# Altium PCB Copy of PCB NHÓM 18-L01.pcbdoc
Units mil, origin at the board's own origin, x right, y up, seen from the top; angles counter-clockwise.
Board outline 2722.2 x 1700 mil, 2 copper layers (Top Layer, Bottom Layer); 35 components, 51 nets, 178 pads, 25 vias.
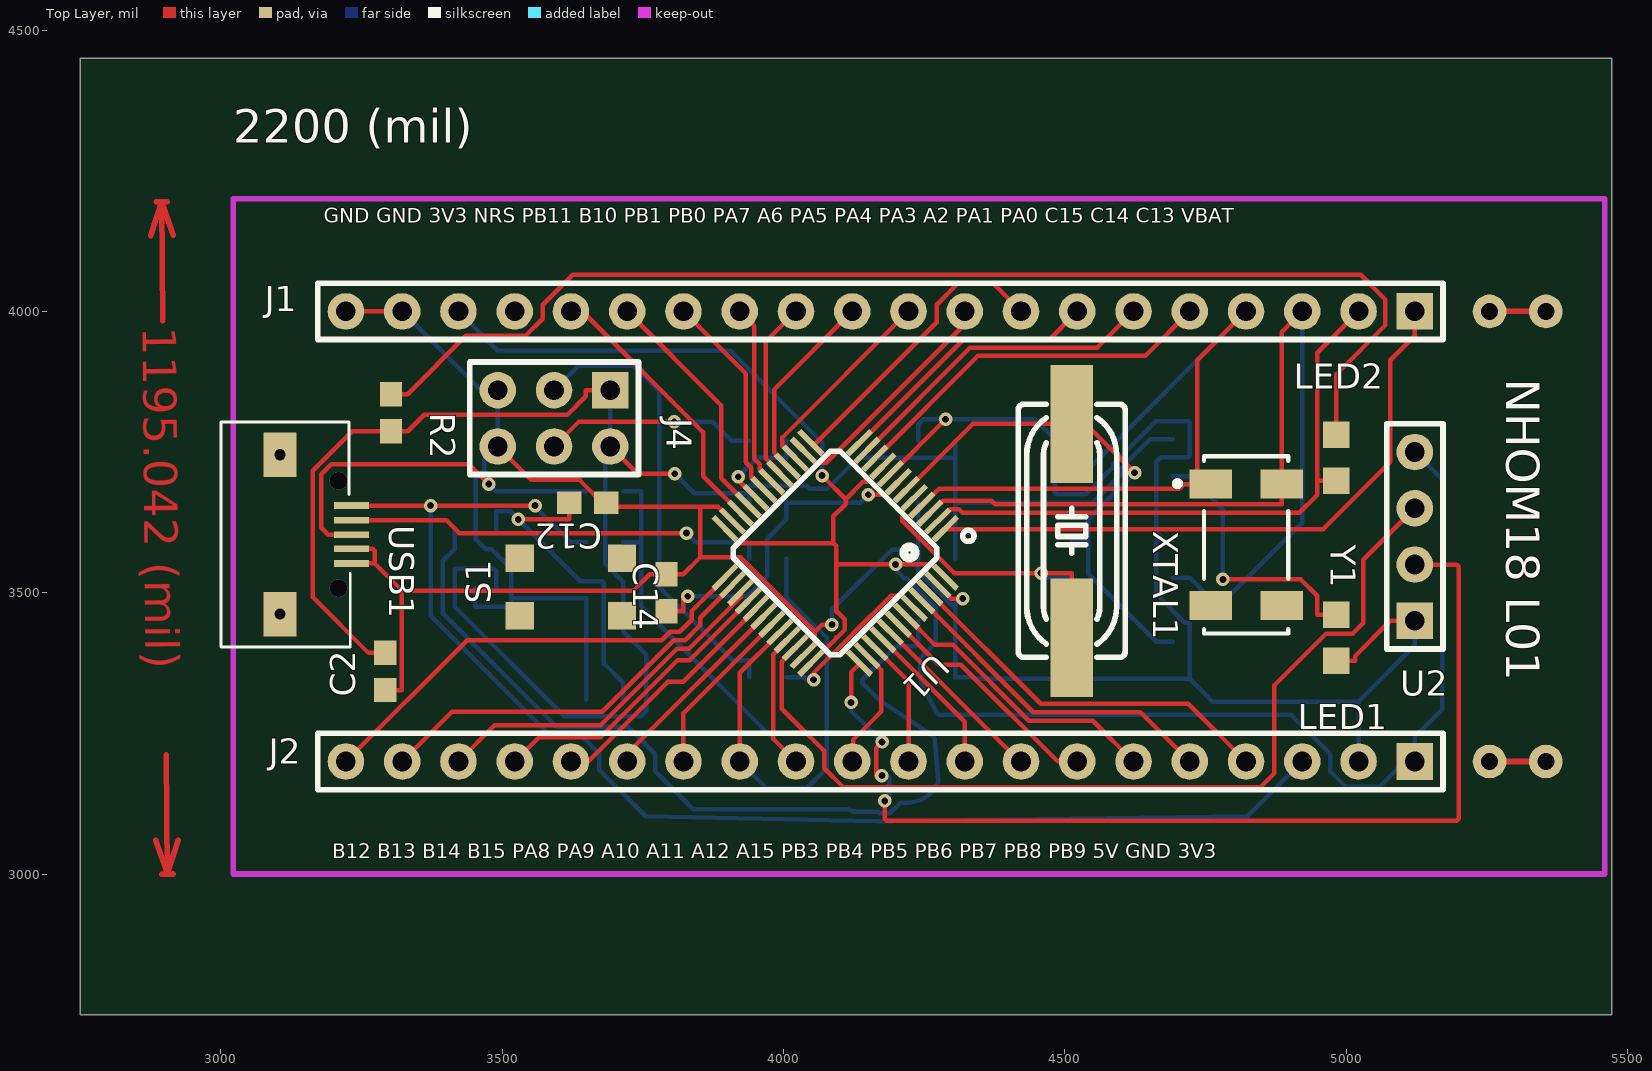
[diagram p0: Top Layer view]
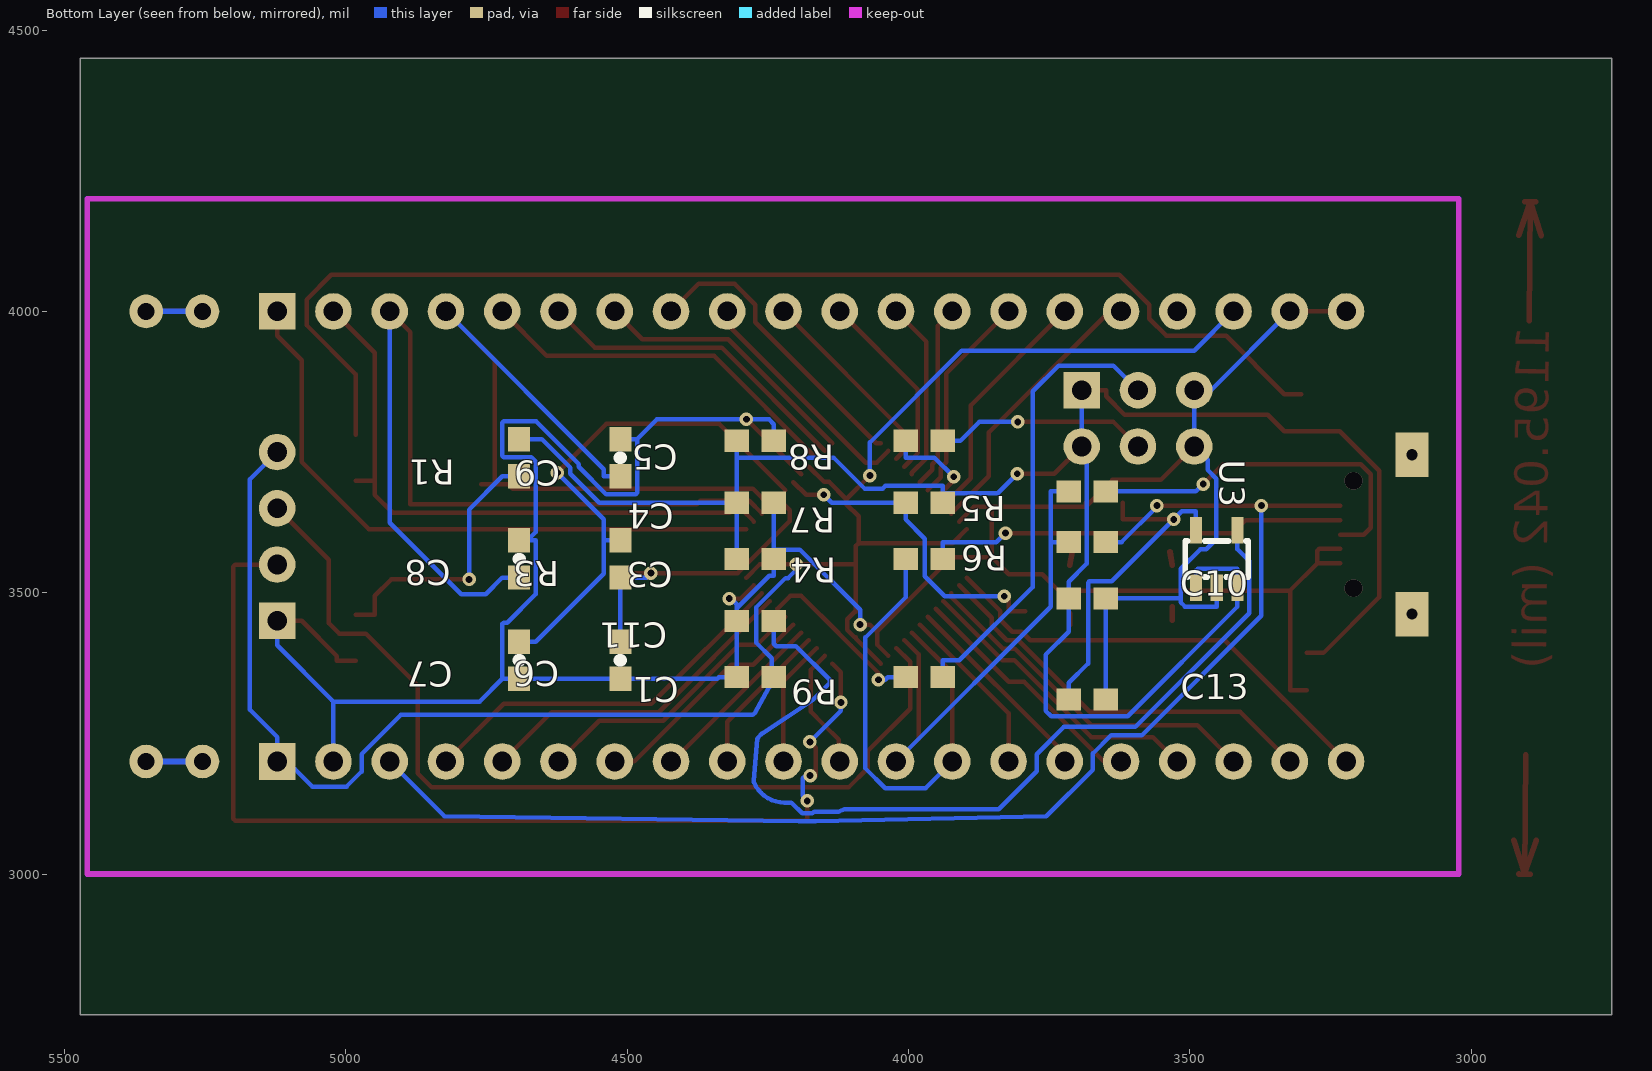
[diagram p1: Bottom Layer view, seen from below]

## Layer stack, top to bottom
Top Solder Mask Layer: solder mask 0.4, Solder Resist, Dk 3.5
Top Layer: signal copper 1.4
Dielectric1: dielectric 12.6, FR-4, Dk 4.8
Bottom Layer: signal copper 1.4
Bottom Solder Mask Layer: solder mask 0.4, Solder Resist, Dk 3.5

## Board outline
5472.2,2750 2750,2750 2750,4450 5472.2,4450

## Design rules (kind name [scope] priority, off if disabled: settings)
Clearance Default [All] p1: gap=6 ignorepadtopadclearanceinfootprint=FALSE except(0: Region-Region; 7: Arc-Arc Arc-Track Arc-SMDPad Arc-THPad Arc-Via Arc-Fill Arc-Poly Arc-Region Arc-Text Arc-Hole)
PasteMaskExpansion Common_1 [All] p1: expansion=0
PlaneConnect Default_3 [All] p1: planeconnectstyle=Relief reliefexpansion=20 reliefentries=4 reliefconductorwidth=0 reliefairgap=1
PolygonConnect Default_4 [All] p1: connectstyle=Relief reliefconductorwidth=10 reliefentries=4 polygonreliefangle="90 Angle" airgapwidth=10
RoutingVias Default_2 [All] p1: holewidth=12 width=24 viastyle="Through Hole" minholewidth=12 minwidth=24 maxholewidth=2362 maxwidth=3938
SolderMaskExpansion Common [All] p1: expansion=2 istentingtop=FALSE useseparateexpansions=TRUE expansionbottom=2 istentingbottom=FALSE
Width Default_1 [All] p1: maxlimit=1000 minlimit=6 preferedwidth=6
28 further rules are at their usual default settings.

## Components (designator, comment, footprint, x,y, rotation, side; value= is the part's Value field where it differs from the comment)
C1 "100nF" 0603 4272.2,3350 r180 bottom
C2 "100nF" 0603 3292.2,3360 r90 top
C3 "100nF" 0603 4272.2,3560 r0 bottom
C4 "100nF" 0603 4272.2,3660 r0 bottom
C5 "100nF" 0603 4272.2,3770 r0 bottom
C6 "CAP" 0603-CAP 4512.2,3380 r90 bottom
C7 "CAP" 0603-CAP 4692.2,3380 r90 bottom
C8 "CAP" 0603-CAP 4692.2,3560 r270 bottom
C9 "CAP" 0603-CAP 4512.2,3740 r270 bottom
C10 "105" 0603 3682.2,3490 r180 bottom
C11 "223" 0603 4272.2,3450 r180 bottom
C12 "106" 0603 3652.2,3660 r180 top
C13 "104" 0603 3682.2,3310 r0 bottom
C14 "105" 0603 3792.2,3500 r270 top
J1 "HEADER-20P-2.54" H20-2.54 4172.2,4000 r270 top
J2 "HEADER-20P-2.54" H20-2.54 4172.2,3200 r270 top
J4 "F185-1203A1BSYA1" H2X3-2.54 3592.2,3810 r270 top
LED1 "LEDCHIPLED_0805" CHIPLED_0805 4982.2,3420 r180 top
LED2 "LEDCHIPLED_0805" CHIPLED_0805 4982.2,3740 r180 top
R1 "510Ω" 0603 4692.2,3740 r90 bottom
R2 "510Ω" 0603 3302.2,3820 r270 top
R3 "1M" 0603 4512.2,3560 r270 bottom
R4 "20R" 0603 3972.2,3560 r0 bottom
R5 "20R" 0603 3682.2,3680 r0 bottom
R6 "4.7K" 0603 3682.2,3590 r0 bottom
R7 "10K" 0603 3972.2,3660 r180 bottom
R8 "100K" 0603 3972.2,3770 r180 bottom
R9 "100K" 0603 3972.2,3350 r0 bottom
S1 "2P-SW-SMD" 2PSW-SMD 3622.2,3510 r0 top
U1 "IC_UC_STM32" LQFP48 4091.7,3570.73 r225 top
U2 "header4" H4-2.54 5122.2,3600 r180 top
U3 "RT9193-33GB" SOT-23-5 3452.2,3560 r180 bottom
USB1 "USB-Micro-1" MicroUSB 3202.2,3700 r270 top
XTAL1 "8M" HC-49U 4512.2,3610 r270 top
Y1 "RSM200S32.768" RSM200S 4822.2,3590 r270 top

## Footprints (in the part's own frame and the unit in brackets; to place one, negate y for a bottom-side part, rotate by r counter-clockwise, add the part's x,y. Pads: shape width x height; smd on the part's side, far side on the other; paste and mask are expansions set on the pad)
2PSW-SMD [mil]
  rect 50x25 smd: 1(-91,63) 2(91,63) 3(91,-63) 4(-91,-63) P$1(-91,39) P$2(91,39) P$3(91,-39) P$4(-91,-39)
  Top Layer lines w10: -91,-59 -91,-35 ; -91,39 -87,63 ; 87,63 91,39 ; 91,-67 91,-47
0603 [mil]
  rect 43.3x39.4 smd: 1(-33,0) 2(33,0)
0603-CAP [mil]
  rect 43.3x39.4 smd: 1(-33,0) 2(33,0)
  silkscreen extent 0,-1 0,1
CHIPLED_0805 [mil]
  rect 47.2x47.2 smd: A(0,-41) C(0,41)
H2X3-2.54 [mil]
  rect 65x65 hole 35: 1(-50,100)
  round 65 hole 35: 2(-50,0) 3(-50,-100) 4(50,-100) 5(50,0) 6(50,100)
  silkscreen extent -100,-150 100,150
H4-2.54 [mil]
  rect 65x65 hole 35: 1(0,150)
  round 65 hole 35: 2(0,50) 3(0,-50) 4(0,-150)
  silkscreen extent -50,-200 50,200
H20-2.54 [mil]
  rect 65x65 hole 35: 1(0,950)
  round 65 hole 35: 2(0,850) 3(0,750) 4(0,650) 5(0,550) 6(0,450) 7(0,350) 8(0,250) 9(0,150) 10(0,50) 11(0,-50) 12(0,-150) 13(0,-250) 14(0,-350) 15(0,-450) 16(0,-550) 17(0,-650) 18(0,-750) 19(0,-850) 20(0,-950)
  silkscreen extent -50,-1000 50,1000
HC-49U [mil]
  rect 210x76 smd: 1(-190,0) 2(190,0)
  silkscreen extent -225,-95 225,95
LQFP48 [mil]
  rect 59.1x10 smd: 1(-169,108.02) 2(-169.01,89.02) 3(-169.01,69.02) 4(-169,49.02) 5(-169.01,30.02) 6(-169.01,10.02) 7(-169.01,-9.98) 8(-169,-29.98) 9(-169.01,-48.98) 10(-169.01,-68.98) 11(-169,-88.98) 12(-169.01,-107.98) 25(169,-107.98) 26(169,-88.98) 27(169,-68.99) 28(169,-48.97) 29(169,-29.98) 30(169,-9.98) 31(168.99,10.02) 32(169,30.02) 33(169,49.02) 34(168.99,69.02) 35(169,89.02) 36(169,108.02)
  rect 10x59.1 smd: 13(-108,-168.98) 14(-89,-168.98) 15(-69.01,-168.98) 16(-49,-168.98) 17(-30,-168.98) 18(-10.01,-168.98) 19(10,-168.98) 20(30,-168.98) 21(49,-168.98) 22(69,-168.98) 23(89,-168.98) 24(108,-168.98) 37(108,169.02) 38(89,169.02) 39(68.99,169.02) 40(49,169.02) 41(30,169.02) 42(9.99,169.02) 43(-10.01,169.02) 44(-30,169.02) 45(-49,169.02) 46(-69.01,169.02) 47(-89,169.02) 48(-108,169.02)
  silkscreen extent -199,-134 134,156
MicroUSB [mil]
  rect 12x63 smd: 1(45,30) 2(71,30) 3(97,30) 4(122,30) 5(148,30)
  rect 79x59 hole 20: 6(-45,-97) 6(238,-97)
  silkscreen extent -103,-202 296,28
RSM200S [mil]
  rect 51.5x75.5 smd: 1(-103,-63) 2(113,-63) 3(113,63) 4(-103,63)
  silkscreen extent -152,-127 162,75
SOT-23-5 [mil]
  rect 21.7x47.2 smd: 1(-37,-51) 2(0,-51) 3(37,-51) 4(37,51) 5(-37,51)
  silkscreen extent -56,-32 56,32

## Free pads (board coordinates)
  round 60 hole 30: 2(5255,4000) 3(5355,4000) 4(5255,3200) 5(5355,3200)

## Via types
v1: diameter 24, hole 12, Top Layer to Bottom Layer, 23 vias
v2: diameter 31.5, hole 31.5, Top Layer to Bottom Layer, 2 vias

## Nets (pads, with @x,y where several pads share a name; then routed paths per layer and width w, separated by ;. In a path a pad name is that pad's centre, name@x,y a point inside that pad or via, vN(x,y) a via of type N, cw(c..) or ccw(c..) an arc to the next point about the centre after c; other vN are vias at no path point)
5V: J2.3 R6.1 USB1.1 | length 2395.8
  Top Layer w8: USB1.1 v1(3372.8,3655) v1(3558.4,3655)
  Bottom Layer w8: v1(3372.8,3655) 3372.8,3458.83 3585.09,3246.54 3639.98,3246.54 3672.2,3214.32 3672.2,3185.39 3755,3102.59 4165.09,3094 4194.91,3094 4824.8,3102.6 J2.3 ; v1(3558.4,3655) 3558.43,3652.92 3621.35,3590 3635.3,3590 3642.81,3590 3646.03,3590 R6.1
BOOT0: R9.2 U1.44 | length 307.4
  Top Layer w8: v1(4053.4,3345.5) 4053.4,3357.19 4101.59,3405.38 4101.75,3405.38 4124.01,3427.64 4124.01,3427.8 4190.48,3494.27 4210.38,3494.27 U1.44@4232.95,3471.7
  Bottom Layer w8: R9.2 4036.91,3350 4041.37,3345.54 v1(4053.4,3345.5)
BOOT1: R8.1 U1.20 | length 180.3
  Top Layer w8: v1(3919.8,3706.1) 3919.83,3699.92 U1.20@3951.5,3668.25
  Bottom Layer w8: v1(3919.8,3706.1) 3954.01,3740.29 4005.25,3740.29 R8.1
C13_2: C12.2 C13.2 U3.5 | length 620.2
  Top Layer w8: v1(3528.7,3630.3) 3619.25,3630.29 C12.2
  Bottom Layer w8: U3.5 3489.25,3644.61 3514.35,3644.61 v1(3528.7,3630.3) 3638.79,3520.17 3678.61,3520.17 3680.92,3517.86 3680.92,3374.04 3715.25,3339.71 C13.2
GND: C1.1 C2.1 C3.1 C4.1 C5.1 C6.1 C7.1 C8.1 C9.1 C10.2 C11.1 C12.1 C13.1 C14.1 J1.19 J1.20 J2.2 J4.3 J4.4 LED1.C S1.2 U1.8 U1.23 U1.35 U1.47 U2.1 U3.2 USB1.4 USB1.5 | length 6289.1
  Top Layer w8: J1.20 J1.19 ; USB1.5 3273.71,3552 ; USB1.4 3269.96,3578 3273.71,3574.25 3273.71,3552 ; C2.1 3321.91,3326.95 3321.91,3503.8 ; J4.4 3551.86,3700.34 3637.48,3700.34 C12.1@3685.25,3652.57 ; C12.1 C12.1@3685.25,3652.57 ; U1.23@3909.75,3626.55 3883.73,3652.57 3851.62,3652.57 ; U1.35@4035.65,3387.55 4055.91,3407.81 4055.91,3430.59 ; v1(4086,3443.4) 4068.72,3443.4 4055.91,3430.59 ; U1.8@4190.5,3710.7 4190.5,3710.81 v1(4288,3808.3) ; U1.47@4274.65,3513.42 4298.37,3489.7 v1(4318.7,3489.7) ; LED1.C 5015.81,3379 5015.81,3387.12 5078.69,3450 U2.1 ; 3273.71,3552 3321.91,3503.8 ; 3321.91,3503.8 3733.34,3503.8 3762.49,3532.95 3777.35,3532.95 C14.1 3821.91,3532.95 3851.62,3562.66 ; C12.1@3685.25,3652.57 3851.62,3652.57 ; 3851.62,3562.66 3923.84,3562.66 4055.91,3430.59 ; 3851.62,3562.66 3851.62,3652.57
  Bottom Layer w8: J1.19 3462.2,3860 J4.3 J4.4 3468.38,3736.18 3468.38,3718.17 ; U3.2 3452.25,3475.39 3508.7,3475.39 3516,3482.69 3516,3490 ; 3468.37,3718.17 3452.98,3702.78 3452.98,3595.11 3470.71,3577.38 3481.12,3577.38 3516,3542.5 3516,3490 ; C13.1 3649.25,3339.71 3649.25,3460.29 C10.2 3617.59,3490 3516,3490 ; v1(4086,3443.4) 4085.99,3469.58 4193.01,3576.6 C3.1@4239.25,3576.6 ; C4.1 C3.1@4239.25,3576.6 ; C5.1 4239.25,3799.71 4247.85,3808.31 v1(4288,3808.3) 4447.13,3808.31 4482.49,3772.95 ; v1(4318.7,3489.7) 4315.24,3489.7 4305.25,3479.71 4305.25,3472.28 ; C9.1 4482.49,3772.95 ; C8.1 C8.1@4677.35,3592.95 ; J2.2 5022.2,3306.49 ; U2.1 5122.2,3406.49 5024.75,3309.04 5022.2,3306.49 ; C3.1@4239.25,3576.6 C3.1 4239.25,3530.29 4247.24,3530.29 4305.25,3472.28 ; 4305.25,3472.28 4305.25,3464.85 C11.1 C1.1 4336.91,3350 4339.96,3346.95 C6.1 C7.1 4707.06,3346.95 4721.91,3346.95 ; 4482.49,3772.95 4482.49,3677.6 4484.81,3675.28 4537.53,3675.28 4586.11,3723.86 4586.11,3728.71 4662.02,3804.62 4719.59,3804.62 4721.92,3802.29 4721.92,3743.28 4719.59,3740.95 4670.7,3740.95 4662.48,3732.73 4662.48,3607.82 C8.1@4677.35,3592.95 ; C8.1@4677.35,3592.95 4662.49,3592.95 4662.49,3497.6 4713.23,3446.86 4719.58,3446.86 4721.91,3444.53 4721.91,3346.95 ; 4721.91,3346.95 4762.37,3306.49 5022.2,3306.49
J4_2: J4.2 R9.1 | length 815.4
  Bottom Layer w8: J4.2 3635.72,3903.52 3733.39,3903.52 3779.12,3857.79 3779.12,3510.13 3909.54,3379.71 3939.25,3379.71 R9.1
J4_5: J4.5 R8.2 | length 379
  Top Layer w8: J4.5 3635.72,3803.52 v1(3805.8,3803.5)
  Bottom Layer w8: v1(3805.8,3803.5) 3874.07,3803.52 3907.59,3770 R8.2
LED1_A: LED1.A R1.1 | length 484.4
  Top Layer w8: v1(4781,3523.6) 4919.58,3523.62 4948.59,3494.61 4948.59,3461 LED1.A
  Bottom Layer w8: R1.1 4721.91,3706.95 4780.98,3647.88 v1(4781,3523.6)
OSCIN: C6.2 R3.2 U1.5 XTAL1.2 | length 681.9
  Top Layer w8: U1.5@4232.95,3668.25 4211.3,3646.6 4211.3,3627.36 4303.65,3535.01 v1(4457.8,3535) 4512.2,3535.01 XTAL1.2
  Bottom Layer w8: v1(4457.8,3535) 4465.84,3526.95 4482.49,3526.95 R3.2@4497.35,3526.95 ; C6.2 4512.2,3512.1 R3.2@4497.35,3526.95 ; R3.2 R3.2@4497.35,3526.95
OSCOUT: C7.2 R3.1 U1.6 XTAL1.1 | length 933.5
  Top Layer w8: U1.6@4218.8,3682.42 4336.38,3800 XTAL1.1 4537.09,3800 v1(4624.1,3713)
  Bottom Layer w8: R3.1 4541.91,3592.95 ; v1(4624.1,3713) 4541.91,3630.74 4541.91,3592.95 ; C7.2 4662.49,3412.95 4541.91,3533.53 4541.91,3592.95
PA0: J1.5 U1.10 | length 667.7
  Top Layer w8: U1.10@4162.95,3738.25 4345.44,3920.74 4642.94,3920.74 J1.5
PA1: J1.6 U1.11 | length 576
  Top Layer w8: U1.11@4148.78,3752.42 4332.11,3935.75 4557.95,3935.75 J1.6
PA2: J1.7 U1.12 | length 483.8
  Top Layer w8: U1.12@4135.35,3765.85 4320.26,3950.76 4472.96,3950.76 J1.7
PA3: J1.8 U1.13 | length 528.9
  Top Layer w8: U1.13@4049.08,3765.85 4057.21,3765.85 4272.2,3980.84 4272.2,4011.99 4309.16,4048.95 4373.25,4048.95 J1.8
PA4: J1.9 U1.14 | length 420.1
  Top Layer w8: U1.14@4035.65,3752.42 4056.88,3731.19 4076.2,3731.19 4322.2,3977.19 J1.9
PA5: J1.10 U1.15 | length 364.2
  Top Layer w8: U1.15@4021.53,3738.25 3998.17,3761.61 3998.17,3775.97 J1.10
PA6: J1.11 U1.16 | length 343.5
  Top Layer w8: U1.16@4007.35,3724.15 3983.15,3748.35 3983.15,3860.95 J1.11
PA7: J1.12 U1.17 | length 322.4
  Top Layer w8: U1.17@3993.95,3710.7 3993.95,3713.19 3968.13,3739.01 3968.13,3945.93 J1.12
PA8: J2.16 U1.29 | length 441.8
  Top Layer w8: J2.16 3652.9,3200 3794.69,3341.79 3821.59,3341.79 U1.29@3951.5,3471.7
PA9: J2.15 U1.30 | length 358.4
  Top Layer w8: J2.15 3722.2,3214.1 U1.30@3965.65,3457.55
PA10: J2.14 U1.31 | length 308.7
  Top Layer w8: J2.14 3822.2,3285.82 U1.31@3979.8,3443.42
PA11: J2.13 R4.2 U1.32 | length 849.3
  Top Layer w8: J2.13 3922.2,3357.5 U1.32@3993.95,3429.25
  Bottom Layer w8: J2.13 3969.71,3152.49 4041.34,3152.49 4076.46,3187.61 4076.46,3420.39 4005.25,3491.6 4005.25,3530.29 R4.2
PA12: J2.12 R5.2 R6.2 U1.33 | length 900.3
  Top Layer w8: U1.33@4007.35,3415.85 3982.09,3390.59 3982.09,3240.11 J2.12
  Bottom Layer w8: R6.2 3746.91,3590 ; R5.2 3746.91,3680 3746.91,3590 ; J2.12 3746.91,3475.29 3746.91,3590
PA15: J2.11 U1.38 | length 218.7
  Top Layer w8: J2.11@4122.41,3200.21 4123.69,3201.49 4123.69,3238.4 4151,3265.71 4173.46,3288.17 4173.46,3362.87 4166.23,3370.1 U1.38@4148.78,3387.55
PB0: J1.13 U1.18 | length 327.3
  Top Layer w8: J1.13 3947.72,3974.48 3947.72,3738.19 3957.85,3728.06 3957.85,3718.5 U1.18@3979.8,3696.55
PB1: J1.14 U1.19 | length 377
  Top Layer w8: J1.14 3932.65,3889.55 3932.65,3732.03 3942.84,3721.84 3942.84,3705.23 U1.19@3965.65,3682.42
PB3: J2.10 U1.39 | length 226.2
  Top Layer w8: U1.39@4162.95,3401.7 4222.2,3342.45 J2.10
PB4: J2.9 U1.40 | length 276
  Top Layer w8: U1.40@4177.05,3415.85 4322.2,3270.7 J2.9
PB5: J2.8 U1.41 | length 326.7
  Top Layer w8: U1.41@4190.5,3429.25 4419.75,3200 J2.8
PB6: J2.7 U1.42 | length 418.4
  Top Layer w8: U1.42@4204.65,3443.42 4275.9,3372.17 4315.13,3372.16 4487.29,3200 J2.7
PB7: J2.6 U1.43 | length 510.1
  Top Layer w8: U1.43@4218.8,3457.55 4268.54,3407.81 4300.71,3407.81 4435.83,3272.69 4549.51,3272.69 J2.6
PB8: J2.5 U1.45 | length 594
  Top Layer w8: U1.45@4246.35,3485.15 4443.8,3287.7 4634.5,3287.7 J2.5
PB9: J2.4 U1.46 | length 685.6
  Top Layer w8: U1.46@4260.53,3499.25 4457.07,3302.71 4719.49,3302.71 J2.4
PB10: J1.15 U1.21 | length 434.6
  Top Layer w8: J1.15 3889.45,3832.75 3889.45,3703.45 U1.21@3938.05,3654.85
PB11: J1.16 U1.22 | length 496
  Top Layer w8: J1.16 3642.18,4000 3857.41,3784.77 3857.41,3707.24 U1.22@3923.95,3640.7
PB12: J2.20 U1.25 | length 818.5
  Top Layer w8: J2.20 3437.88,3415.68 3783.62,3415.68 3798.65,3430.71 3815.5,3430.71 3836.93,3452.14 3836.93,3467.43 U1.25@3896.35,3526.85
PB13: J2.19 U1.26 | length 725
  Top Layer w8: J2.19 3410.74,3288.54 3677.71,3288.54 3804.87,3415.7 3825.09,3415.7 3851.95,3442.56 3851.95,3455.62 U1.26@3909.75,3513.42
PB14: J2.18 U1.27 | length 629.8
  Top Layer w8: J2.18 3486.94,3264.74 3675.14,3264.74 3811.09,3400.69 3832.32,3400.69 3923.95,3492.32 U1.27@3923.95,3499.25
PB15: J2.17 U1.28 | length 534
  Top Layer w8: J2.17 3565.71,3243.51 3675.14,3243.51 3811.99,3380.36 3833.26,3380.36 U1.28@3938.05,3485.15
PC13: J1.2 LED2.C U1.2 | length 1088.9
  Top Layer w8: U1.2@4274.65,3626.55 4296.45,3648.35 4311.88,3648.35 4318.06,3642.17 4916.97,3642.17 4948.59,3673.79 4948.59,3699 ; LED2.C 4948.59,3699 ; J1.2 4948.59,3926.39 4948.59,3699
PC14: C8.2 J1.3 U1.3 Y1.4 | length 1665.2
  Top Layer w8: U1.3@4260.53,3640.7 4283.2,3663.37 4369.76,3663.37 4375.94,3657.19 4885.2,3657.19 4885.2,3675.07 Y1.4 4885.2,3963 J1.3
  Bottom Layer w8: C8.2 4721.91,3526.95 4751.62,3497.24 4794.85,3497.24 4922.2,3624.59 J1.3
PC15: C9.2 J1.4 U1.4 Y1.1 | length 1310.6
  Top Layer w8: U1.4@4246.35,3654.85 4276.49,3684.99 4703.53,3684.99 4711.49,3692.95 Y1.1@4735.37,3692.95 ; Y1.1 Y1.1@4735.37,3692.95 ; J1.4 4735.37,3913.17 Y1.1@4735.37,3692.95
  Bottom Layer w8: C9.2 4541.91,3706.95 4541.91,3719.71 J1.4
R2_1: LED2.A R2.1 | length 2164.5
  Top Layer w8: R2.1 3331.91,3852.95 3435.44,3956.48 3541.47,3956.48 3572.2,3987.21 3572.2,4011.81 3625.25,4064.86 5026.07,4064.86 5069.98,4020.95 5069.98,3975.78 4982.2,3888 LED2.A
R5_1: R5.1 USB1.3 | length 653
  Top Layer w8: USB1.3 3190.69,3603 3178.16,3615.53 3178.16,3710.56 3196.21,3728.61 3440.63,3728.61 v1(3476,3693.2)
  Bottom Layer w8: v1(3476,3693.2) 3489.24,3680 R5.1
RESET: C14.2 R7.1 S1.3 U1.7 | length 575.1
  Top Layer w8: C14.2 3821.91,3466.95 3821.91,3485.78 v1(3829.9,3493.8) ; v1(4150.5,3673.9) 4181.96,3673.86 U1.7@4204.65,3696.55
  Bottom Layer w8: v1(3829.9,3493.8) 3935.6,3493.81 3970.92,3529.13 3970.92,3595.96 4005.25,3630.29 R7.1 4136.6,3660 v1(4150.5,3673.9)
SWDIO: U1.34 U2.3 | length 1681.9
  Top Layer w8: U1.34@4021.53,3401.7 3997.11,3377.28 3997.11,3293.86 4072.2,3218.77 4072.2,3188.19 4106.55,3153.84 4847.23,3153.84 4872.2,3178.81 4872.2,3335.15 4964.43,3427.38 5012.01,3427.38 5030.64,3446.01 5030.64,3558.44 U2.3
U3_4: C11.2 U3.4 | length 1636.7
  Bottom Layer w8: U3.4 3415.25,3577.39 3394.39,3556.53 3394.39,3463.74 3596.57,3261.56 3723.66,3261.56 3772.2,3213.02 3772.2,3182.51 3839.71,3115 4112.32,3115 4113.63,3115 4124,3111 4167.89,3111 4170.89,3108 4189.11,3108 4207.1,3125.99 4208.06,3126.95 4220.62,3126.95 ; 4220.66,3126.95 ccw(c4220.7,3185.51) 4274.77,3163.03 ccw(c4265.2,3166.96) 4275,3163.65 4275,3165.26 4269.24,3240.76 4267.41,3242.59 4260,3250 4170.67,3308.95 4170.17,3309.45 4140.21,3339.41 4140.21,3345.21 4200,3405 4235.15,3405 4239.25,3409.1 C11.2
USB1_2: R4.1 USB1.2 | length 753
  Top Layer w8: USB1.2 3400.91,3629 3423.88,3606.03 v1(3827.6,3606)
  Bottom Layer w8: v1(3827.6,3606) 3843.9,3589.71 3939.25,3589.71 R4.1
VBAT: J1.1 U1.1 | length 1125.7
  Top Layer w8: U1.1@4288.08,3613.12 4959.45,3613.12 5078.69,3732.36 5078.69,3912.98 5122.2,3956.49 J1.1
VCC: C2.2 C3.2 C4.2 C5.2 C10.1 J4.1 J4.6 R1.2 R2.2 R7.2 U3.1 U3.3 | length 3543.8
  Top Layer w8: C2.2 3262.49,3392.95 3163.15,3492.29 3163.15,3716.78 3233.32,3786.95 R2.2 3331.91,3786.95 3361.45,3816.49 3616.07,3816.49 3648.69,3849.11 3648.69,3860 J4.1 ; J4.6 3740.74,3711.46 v1(3806.6,3711.5)
  Bottom Layer w8: U3.1 3489.25,3538.85 3485.49,3542.61 3415.25,3542.61 3415.25,3525.8 U3.3 3415.25,3475.39 3610.36,3280.28 3746.5,3280.28 3756.43,3290.21 3756.43,3389.5 3715.25,3430.68 C10.1 3715.25,3493.17 3715.25,3519.71 3683.56,3551.4 3683.56,3751.36 J4.6 3692.2,3816.49 J4.1 ; v1(3806.6,3711.5) 3841.41,3676.69 R7.2@3939.25,3676.69 ; R7.2 R7.2@3939.25,3676.69 ; C3.2 C4.2 ; C5.2 4305.25,3740.29 ; R1.2 4662.49,3772.95 4651.58,3772.95 4601.12,3722.49 4601.12,3711.58 4549.54,3660 C4.2 ; R7.2@3939.25,3676.69 3939.25,3689.71 4041.25,3689.71 4045.79,3685.17 4078.13,3685.17 4133.25,3740.29 4305.25,3740.29 ; C4.2 4305.25,3740.29
VCC3V3: C1.2 J1.18 J2.1 U1.9 U1.24 U1.36 U1.48 U2.4 | length 3540.3
  Top Layer w8: U1.24@3896.35,3613.12 3921.4,3588.07 4088.58,3588.07 ; U1.36@4049.08,3374.12 4093.62,3418.66 4093.62,3420.39 4095.53,3420.39 4109,3433.86 4109,3452.94 4095.53,3466.41 4093.62,3466.41 4093.62,3550.2 ; v1(4068.6,3708.2) 4110.42,3666.35 ; U1.9@4177.05,3724.15 4149.77,3696.87 4140.93,3696.87 4110.42,3666.35 ; U1.48@4288.08,3526.85 4264.73,3550.2 4093.62,3550.2 ; 4088.58,3588.07 4088.58,3635.68 4110.42,3657.52 4110.42,3666.35 ; 4088.58,3588.07 4093.62,3583.03 4093.62,3550.2
  Bottom Layer w6: J2.1@5090.94,3186.74 5108.94,3186.74 J2.1
  Bottom Layer w8: J1.18 3492.2,3930 3905.67,3930 4068.59,3767.08 v1(4068.6,3708.2) ; v1(4199.2,3550.2) 4199.15,3541.05 4214.07,3526.13 4218.62,3526.13 4270.92,3473.83 4270.92,3411.38 4243.26,3383.72 4243.26,3365.7 4245.05,3334.3 4249.15,3330.2 4272.72,3286.82 4276.82,3282.72 4279.72,3282.72 4902.3,3282.72 4972.2,3212.82 4972.2,3182.12 4998.83,3155.49 5059.69,3155.49 J2.1@5090.94,3186.74 ; J2.1 5122.2,3218 5122.2,3243.51 5170.51,3291.82 5170.51,3701.69 U2.4
pads on no net: J1.17 S1.1 S1.4 S1.P$1 S1.P$2 S1.P$3 S1.P$4 U1.37 U2.2 USB1.6 Y1.2 Y1.3
copper on no net: | length 3001
  Top Layer w8: v1(4120,3305) 4120,3358.77 4135.35,3374.12 ; v1(4175,3175) 4173.51,3173.51 4165,3173.51 4165,3224.42 v1(4175.29,3234.71) ; v1(4180,3130) 4180,3098.51 4183.51,3095 5196.49,3095 5200,3098.51 5200,3546.49 5196.49,3550 5122.2,3550
  Top Layer w10: 2875.5,4134.83 2895,4195 ; 2884.5,3059.83 2905,3000 ; 2885,4194.92 2905,4195.08 ; 2895,2999.92 2915,3000.08 ; 2896.77,3983.37 2895,4195 ; 2903.23,3211.63 2905,3000 ; 2915.5,4135.17 2895,4195 ; 2924.5,3060.17 2905,3000 ; 5255,3200 5355,3200 ; 5255,4000 5355,4000
  Bottom Layer w6: v1@4185.93,3135.93 v1@4185.93,3136.64
  Bottom Layer w8: v1(4120,3305) 4120,3290 v1(4175.29,3234.71) ; v1(4175,3175) 4183,3175 4188,3170 4188,3138.71 v1@4185.93,3136.64 ; v1(4180,3130) v1@4185.93,3135.93
  Bottom Layer w10: 5255,3200 5355,3200 ; 5255,4000 5355,4000
  other v2: 3209.2,3508.1 3209.2,3699

## Keep-outs
Board Outline Layer:
  lines w10: 3022.2,3000 3022.2,4200 3025,4200 5460,4200 5460,3000 3022.2,3000

## Other copper
Top Layer:
  text "1195.042 (mil)" at 2860.87,3973.07 h60 r270.48

## Silkscreen, mask and mechanical layers (free items; w line width, h text height)
Top Silkscreen Layer:
  text "2200 (mil)" at 3022.2,4300 h60
  text "GND GND 3V3 NRS PB11 B10 PB1 PB0 PA7 A6 PA5 PA4 PA3 A2 PA1 PA0 C15 C14 C13 VBAT" at 3183,4158 h26
  text "NHOM18 L01" at 5285,3880 h60 r270
  text "B12 B13 B14 B15 PA8 PA9 A10 A11 A12 A15 PB3 PB4 PB5 PB6 PB7 PB8 PB9 5V GND 3V3" at 3198,3028 h26

## Dimensions
3022.56,4230 to 5457.56,4280 on Top Layer